# EAGLE board haptic-tactor-strip (EAGLE 5.12)
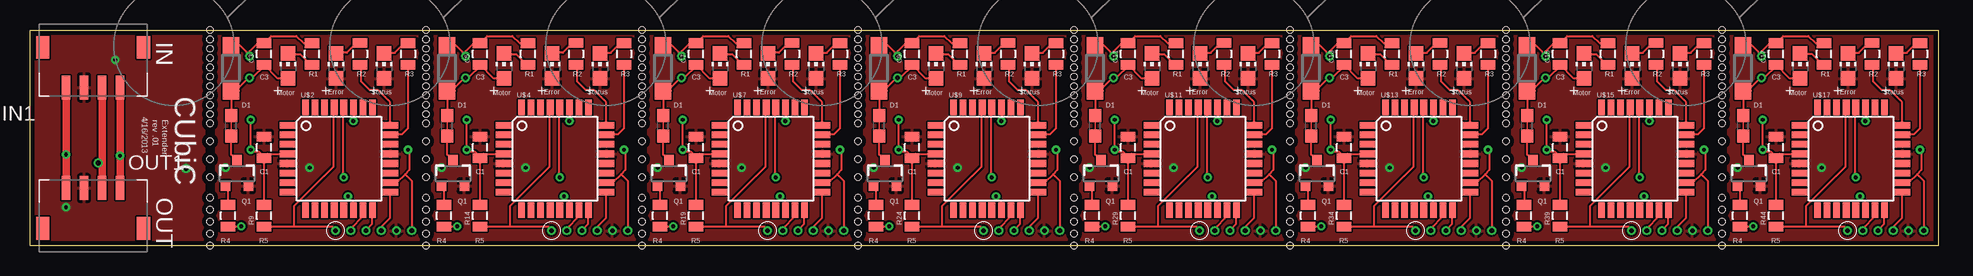
[diagram p0: board, top side]
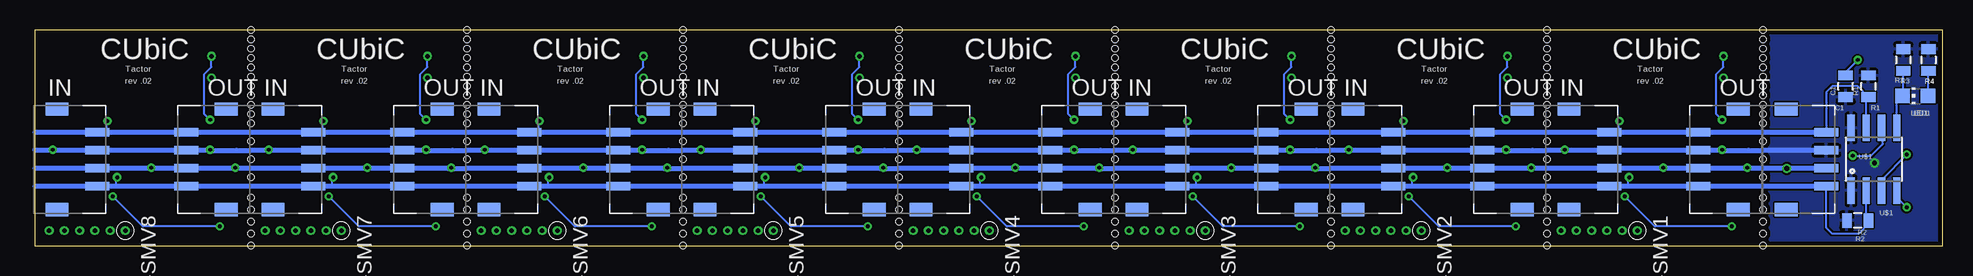
[diagram p1: board, bottom side, seen from below]

Size 159 x 18 mm. Coordinates in mm from the lower left corner, seen from the top.
Outline: 15,0 0,0 0,18 15,18 33,18 51,18 69,18 87,18 105,18 123,18 141,18 159,18 159,0 141,0 123,0 105,0 87,0 69,0 51,0 33,0 15,0
Copper layers (1*16): Top 0.0356mm / dielectric 1.5011mm / Bottom 0.0356mm
Design rules "LaenPCBOrder": minimum track width 6mil, minimum drill 13mil, track to track 6mil, track to pad 6mil, pad to pad 6mil, via to via 6mil, smd to smd 6mil, copper to edge 15mil, drill to drill 6mil, minimum pad ring 7mil, minimum via ring 7mil, stop-mask expansion 4mil, vias tented up to drill 0mil, thermal gap 10mil
Net classes: 1 bus: width 0.406 mm, drill 0.406 mm
Holes 0.51 mm at 15,18 15,17.22 15,16.44 15,15.66 15,14.88 15,14.1 15,13.32 15,12.54 15,11.76 15,10.98 15,10.2 15,0 15,1 15,2 15,3 15,4 15,7.2 15,8.7 15,5.7 33,18 33,17.22 33,16.44 33,15.66 33,14.88 33,14.1 33,13.32 33,12.54 33,11.76 33,10.98 33,10.2 33,0 33,1 33,2 33,3 33,4 33,7.2 33,8.7 33,5.7 51,18 51,17.22 51,16.44 51,15.66 51,14.88 51,14.1 51,13.32 51,12.54 51,11.76 51,10.98 51,10.2 51,0 51,1 51,2 51,3 51,4 51,7.2 51,8.7 51,5.7 141,18 141,17.22 141,16.44 141,15.66 141,14.88 141,14.1 141,13.32 141,12.54 141,11.76 141,10.98 141,10.2 141,0 141,1 141,2 141,3 141,4 141,7.2 141,8.7 141,5.7 123,18 123,17.22 123,16.44 123,15.66 123,14.88 123,14.1 123,13.32 123,12.54 123,11.76 123,10.98 123,10.2 123,0 123,1 123,2 123,3 123,4 123,7.2 123,8.7 123,5.7 105,18 105,17.22 105,16.44 105,15.66 105,14.88 105,14.1 105,13.32 105,12.54 105,11.76 105,10.98 105,10.2 105,0 105,1 105,2 105,3 105,4 105,7.2 105,8.7 105,5.7 87,18 87,17.22 87,16.44 87,15.66 87,14.88 87,14.1 87,13.32 87,12.54 87,11.76 87,10.98 87,10.2 87,0 87,1 87,2 87,3 87,4 87,7.2 87,8.7 87,5.7 69,18 69,17.22 69,16.44 69,15.66 69,14.88 69,14.1 69,13.32 69,12.54 69,11.76 69,10.98 69,10.2 69,0 69,1 69,2 69,3 69,4 69,7.2 69,8.7 69,5.7

## Footprints (pad centres in the part's own frame; a part is rotated, then mirrored left to right if it is on the bottom)
0805 = smd 0.8 x 1.2: 1 -0.9,0; 2 0.9,0
SOD123 = smd 1.4 x 1.4: A 1.9,0; C -1.9,0
S4B-ZR-SM4A-TF = smd 0.7 x 2: P$1 -2.25,-2.3; P$2 -0.75,-2.3; P$3 0.75,-2.3; P$4 2.25,-2.3 | smd 1.1 x 1.9: P$5 -4.2,1.05; P$6 4.2,1.05
CHIP-LED0805 = smd 1.2 x 1.2: A 0,-1.05; C 0,1.05
SOT23-3 = smd 0.8 x 0.9: 1 -0.95,-1; 2 0.95,-1; 3 0,1.1
0603-TRACE = smd 1.1 x 1: 1 -0.85,0; 2 0.85,0
SO08 = smd 0.61 x 2.21: 1 -1.905,-2.616; 2 -0.635,-2.616; 3 0.635,-2.616; 4 1.905,-2.616; 5 1.905,2.616; 6 0.635,2.616; 7 -0.635,2.616; 8 -1.905,2.616
TQFP32-08 = smd 1.27 x 0.559: 1 -4.293,2.8; 2 -4.293,2; 3 -4.293,1.2; 4 -4.293,0.4; 5 -4.293,-0.4; 6 -4.293,-1.2; 7 -4.293,-2; 8 -4.293,-2.8; 17 4.293,-2.8; 18 4.293,-2; 19 4.293,-1.2; 20 4.293,-0.4; 21 4.293,0.4; 22 4.293,1.2; 23 4.293,2; 24 4.293,2.8 | smd 0.559 x 1.27: 9 -2.8,-4.293; 10 -2,-4.293; 11 -1.2,-4.293; 12 -0.4,-4.293; 13 0.4,-4.293; 14 1.2,-4.293; 15 2,-4.293; 16 2.8,-4.293; 25 2.8,4.293; 26 2,4.293; 27 1.2,4.293; 28 0.4,4.293; 29 -0.4,4.293; 30 -1.2,4.293; 31 -2,4.293; 32 -2.8,4.293
VIBE-MOTOR-10MM-SMALLVIA = drill 0.381 round: + -5.08,-3.81; - -6.35,-2.54
POGOPROG-CONN-SMALLERVIAS = drill 0.381 round: 1 0,2.54; 2 0,1.27; 3 0,0; 4 0,-1.27; 5 0,-2.54; 6 0,-3.81

## Placement (x,y rotation side)
C1  0.01uF  [0805]  8.1,13.3 90 bottom
C2  0.1uF  [0805]  19.5,8.2 90 top
C3  Optional  [0805]  19.5,16 90 top
C4  0.1uF  [0805]  37.5,8.2 90 top
C5  Optional  [0805]  37.5,16 90 top
C6  0.1uF  [0805]  55.5,8.2 90 top
C7  Optional  [0805]  55.5,16 90 top
C8  0.1uF  [0805]  73.5,8.2 90 top
C9  Optional  [0805]  73.5,16 90 top
C10  0.1uF  [0805]  91.5,8.2 90 top
C11  Optional  [0805]  91.5,16 90 top
C12  0.1uF  [0805]  109.5,8.2 90 top
C13  Optional  [0805]  109.5,16 90 top
C14  0.1uF  [0805]  127.5,8.2 90 top
C15  Optional  [0805]  127.5,16 90 top
C16  0.1uF  [0805]  145.5,8.2 90 top
C17  Optional  [0805]  145.5,16 90 top
D1  [SOD123]  16.75,14.8 270 top
D2  [SOD123]  34.75,14.8 270 top
D3  [SOD123]  52.75,14.8 270 top
D4  [SOD123]  70.75,14.8 270 top
D5  [SOD123]  88.75,14.8 270 top
D6  [SOD123]  106.75,14.8 270 top
D7  [SOD123]  124.75,14.8 270 top
D8  [SOD123]  142.75,14.8 270 top
IN  S4B-ZR-SM4A-TF  [S4B-ZR-SM4A-TF]  12,7.2 90 bottom
IN1  S4B-ZR-SM4A-TF  [S4B-ZR-SM4A-TF]  5.25,15.5 0 top
IN2  S4B-ZR-SM4A-TF  [S4B-ZR-SM4A-TF]  30.1,7.2 90 bottom
IN3  S4B-ZR-SM4A-TF  [S4B-ZR-SM4A-TF]  48.1,7.2 90 bottom
IN4  S4B-ZR-SM4A-TF  [S4B-ZR-SM4A-TF]  66.1,7.2 90 bottom
IN5  S4B-ZR-SM4A-TF  [S4B-ZR-SM4A-TF]  84.1,7.2 90 bottom
IN6  S4B-ZR-SM4A-TF  [S4B-ZR-SM4A-TF]  102.1,7.2 90 bottom
IN7  S4B-ZR-SM4A-TF  [S4B-ZR-SM4A-TF]  120.1,7.2 90 bottom
IN8  S4B-ZR-SM4A-TF  [S4B-ZR-SM4A-TF]  138.1,7.2 90 bottom
IN9  S4B-ZR-SM4A-TF  [S4B-ZR-SM4A-TF]  156.1,7.2 90 bottom
LED1  [CHIP-LED0805]  2.3,12.5 90 bottom
LED2  [CHIP-LED0805]  21.5,15 0 top
LED3  [CHIP-LED0805]  25.5,15 0 top
LED4  [CHIP-LED0805]  29.5,15 0 top
LED5  [CHIP-LED0805]  39.5,15 0 top
LED6  [CHIP-LED0805]  43.5,15 0 top
LED7  [CHIP-LED0805]  47.5,15 0 top
LED8  [CHIP-LED0805]  57.5,15 0 top
LED9  [CHIP-LED0805]  61.5,15 0 top
LED10  [CHIP-LED0805]  65.5,15 0 top
LED11  [CHIP-LED0805]  75.5,15 0 top
LED12  [CHIP-LED0805]  79.5,15 0 top
LED13  [CHIP-LED0805]  83.5,15 0 top
LED14  [CHIP-LED0805]  93.5,15 0 top
LED15  [CHIP-LED0805]  97.5,15 0 top
LED16  [CHIP-LED0805]  101.5,15 0 top
LED17  [CHIP-LED0805]  111.5,15 0 top
LED18  [CHIP-LED0805]  115.5,15 0 top
LED19  [CHIP-LED0805]  119.5,15 0 top
LED20  [CHIP-LED0805]  129.5,15 0 top
LED21  [CHIP-LED0805]  133.5,15 0 top
LED22  [CHIP-LED0805]  137.5,15 0 top
LED23  [CHIP-LED0805]  147.5,15 0 top
LED24  [CHIP-LED0805]  151.5,15 0 top
LED25  [CHIP-LED0805]  155.5,15 0 top
OUT  S4B-ZR-SM4A-TF  [S4B-ZR-SM4A-TF]  18.1,7.2 270 bottom
OUT1  S4B-ZR-SM4A-TF  [S4B-ZR-SM4A-TF]  5.25,2.5 180 top
OUT2  S4B-ZR-SM4A-TF  [S4B-ZR-SM4A-TF]  36.1,7.2 270 bottom
OUT3  S4B-ZR-SM4A-TF  [S4B-ZR-SM4A-TF]  54.1,7.2 270 bottom
OUT4  S4B-ZR-SM4A-TF  [S4B-ZR-SM4A-TF]  72.1,7.2 270 bottom
OUT5  S4B-ZR-SM4A-TF  [S4B-ZR-SM4A-TF]  90.1,7.2 270 bottom
OUT6  S4B-ZR-SM4A-TF  [S4B-ZR-SM4A-TF]  108.1,7.2 270 bottom
OUT7  S4B-ZR-SM4A-TF  [S4B-ZR-SM4A-TF]  126.1,7.2 270 bottom
OUT8  S4B-ZR-SM4A-TF  [S4B-ZR-SM4A-TF]  144.1,7.2 270 bottom
Q1  MOSFET-NCHANNELSMD  [SOT23-3]  17.25,6 0 top
Q2  MOSFET-NCHANNELSMD  [SOT23-3]  35.25,6 0 top
Q3  MOSFET-NCHANNELSMD  [SOT23-3]  53.25,6 0 top
Q4  MOSFET-NCHANNELSMD  [SOT23-3]  71.25,6 0 top
Q5  MOSFET-NCHANNELSMD  [SOT23-3]  89.25,6 0 top
Q6  MOSFET-NCHANNELSMD  [SOT23-3]  107.25,6 0 top
Q7  MOSFET-NCHANNELSMD  [SOT23-3]  125.25,6 0 top
Q8  MOSFET-NCHANNELSMD  [SOT23-3]  143.25,6 0 top
R1  10k  [0805]  6.2,13.3 90 bottom
R2  10k  [0805]  7.1,2.1 180 bottom
R3  10k  [0805]  3.3,15.5 270 bottom
R4  470  [0805]  1.2,15.5 270 bottom
R5  470  [0805]  27.5,16 270.1 top
R6  470  [0805]  31.5,16 270 top
R7  470  [0805]  23.5,16 90 top
R8  10k  [0805]  16.5,2.5 90 top
R9  10k  [0805]  19.5,2.5 90 top
R10  470  [0805]  45.5,16 270.1 top
R11  470  [0805]  49.5,16 270 top
R12  470  [0805]  41.5,16 90 top
R13  10k  [0805]  34.5,2.5 90 top
R14  10k  [0805]  37.5,2.5 90 top
R15  470  [0805]  63.5,16 270.1 top
R16  470  [0805]  67.5,16 270 top
R17  470  [0805]  59.5,16 90 top
R18  10k  [0805]  52.5,2.5 90 top
R19  10k  [0805]  55.5,2.5 90 top
R20  470  [0805]  81.5,16 270.1 top
R21  470  [0805]  85.5,16 270 top
R22  470  [0805]  77.5,16 90 top
R23  10k  [0805]  70.5,2.5 90 top
R24  10k  [0805]  73.5,2.5 90 top
R25  470  [0805]  99.5,16 270.1 top
R26  470  [0805]  103.5,16 270 top
R27  470  [0805]  95.5,16 90 top
R28  10k  [0805]  88.5,2.5 90 top
R29  10k  [0805]  91.5,2.5 90 top
R30  470  [0805]  117.5,16 270.1 top
R31  470  [0805]  121.5,16 270 top
R32  470  [0805]  113.5,16 90 top
R33  10k  [0805]  106.5,2.5 90 top
R34  10k  [0805]  109.5,2.5 90 top
R35  470  [0805]  135.5,16 270.1 top
R36  470  [0805]  139.5,16 270 top
R37  470  [0805]  131.5,16 90 top
R38  10k  [0805]  124.5,2.5 90 top
R39  10k  [0805]  127.5,2.5 90 top
R40  470  [0805]  153.5,16 270.1 top
R41  470  [0805]  157.5,16 270 top
R42  470  [0805]  149.5,16 90 top
R43  10k  [0805]  142.5,2.5 90 top
R44  10k  [0805]  145.5,2.5 90 top
SJ1  SOLDERJUMPER0603  [0603-TRACE]  16.75,10 90 top
SJ2  SOLDERJUMPER0603  [0603-TRACE]  34.75,10 90 top
SJ3  SOLDERJUMPER0603  [0603-TRACE]  52.75,10 90 top
SJ4  SOLDERJUMPER0603  [0603-TRACE]  70.75,10 90 top
SJ5  SOLDERJUMPER0603  [0603-TRACE]  88.75,10 90 top
SJ6  SOLDERJUMPER0603  [0603-TRACE]  106.75,10 90 top
SJ7  SOLDERJUMPER0603  [0603-TRACE]  124.75,10 90 top
SJ8  SOLDERJUMPER0603  [0603-TRACE]  142.75,10 90 top
U$1  BUS-EXTENDER  [SO08]  5.75,7.2 0 bottom
U$2  ATTINY48  [TQFP32-08]  25.75,7.25 0 top
U$3  MOTORSMALLVIA  [VIBE-MOTOR-10MM-SMALLVIA]  30,16.7 135 top
U$4  ATTINY48  [TQFP32-08]  43.75,7.25 0 top
U$5  MOTORSMALLVIA  [VIBE-MOTOR-10MM-SMALLVIA]  48,16.7 135 top
U$6  MOTORSMALLVIA  [VIBE-MOTOR-10MM-SMALLVIA]  12,16.7 135 top
U$7  ATTINY48  [TQFP32-08]  61.75,7.25 0 top
U$8  MOTORSMALLVIA  [VIBE-MOTOR-10MM-SMALLVIA]  66,16.7 135 top
U$9  ATTINY48  [TQFP32-08]  79.75,7.25 0 top
U$10  MOTORSMALLVIA  [VIBE-MOTOR-10MM-SMALLVIA]  84,16.7 135 top
U$11  ATTINY48  [TQFP32-08]  97.75,7.25 0 top
U$12  MOTORSMALLVIA  [VIBE-MOTOR-10MM-SMALLVIA]  102,16.7 135 top
U$13  ATTINY48  [TQFP32-08]  115.75,7.25 0 top
U$14  MOTORSMALLVIA  [VIBE-MOTOR-10MM-SMALLVIA]  120,16.7 135 top
U$15  ATTINY48  [TQFP32-08]  133.75,7.25 0 top
U$16  MOTORSMALLVIA  [VIBE-MOTOR-10MM-SMALLVIA]  138,16.7 135 top
U$17  ATTINY48  [TQFP32-08]  151.75,7.25 0 top
WITHVIAS-SMV1  POGOPROG-CONNWITH-VIAS  [POGOPROG-CONN-SMALLERVIAS]  28,1.25 270 bottom
WITHVIAS-SMV2  POGOPROG-CONNWITH-VIAS  [POGOPROG-CONN-SMALLERVIAS]  46,1.25 270 bottom
WITHVIAS-SMV3  POGOPROG-CONNWITH-VIAS  [POGOPROG-CONN-SMALLERVIAS]  64,1.25 270 bottom
WITHVIAS-SMV4  POGOPROG-CONNWITH-VIAS  [POGOPROG-CONN-SMALLERVIAS]  82,1.25 270 bottom
WITHVIAS-SMV5  POGOPROG-CONNWITH-VIAS  [POGOPROG-CONN-SMALLERVIAS]  100,1.25 270 bottom
WITHVIAS-SMV6  POGOPROG-CONNWITH-VIAS  [POGOPROG-CONN-SMALLERVIAS]  118,1.25 270 bottom
WITHVIAS-SMV7  POGOPROG-CONNWITH-VIAS  [POGOPROG-CONN-SMALLERVIAS]  136,1.25 270 bottom
WITHVIAS-SMV8  POGOPROG-CONNWITH-VIAS  [POGOPROG-CONN-SMALLERVIAS]  154,1.25 270 bottom

## Library data of the parts
C1-C17 Q1-Q8 R1-R44 = SparkFun
D1-D8 = diode
IN IN1-IN9 OUT OUT1-OUT8 = cubic
LED1 = led
LED2-LED25 = adafruit
SJ1-SJ8 U$1-U$17 = jjr
WITHVIAS-SMV1-WITHVIAS-SMV8 = pogoProg-eagle5

## Nets
ERROR: R5.2 U$2.24
ERROR1: R10.2 U$4.24
ERROR2: R15.2 U$7.24
ERROR3: R20.2 U$9.24
ERROR4: R25.2 U$11.24
ERROR5: R30.2 U$13.24
ERROR6: R35.2 U$15.24
ERROR7: R40.2 U$17.24
GND [bus]: C1.2 IN1.P$2 IN.P$2 OUT1.P$3 U$1.4
GND1: C2.2 IN2.P$2 LED3.A LED4.A OUT.P$3 Q1.2 U$2.5 U$2.21 WITHVIAS-SMV1.5
GND2: C4.2 IN3.P$2 LED6.A LED7.A OUT2.P$3 Q2.2 U$4.5 U$4.21 WITHVIAS-SMV2.5
GND3: C6.2 IN4.P$2 LED9.A LED10.A OUT3.P$3 Q3.2 U$7.5 U$7.21 WITHVIAS-SMV3.5
GND4: C8.2 IN5.P$2 LED12.A LED13.A OUT4.P$3 Q4.2 U$9.5 U$9.21 WITHVIAS-SMV4.5
GND5: C10.2 IN6.P$2 LED15.A LED16.A OUT5.P$3 Q5.2 U$11.5 U$11.21 WITHVIAS-SMV5.5
GND6: C12.2 IN7.P$2 LED18.A LED19.A OUT6.P$3 Q6.2 U$13.5 U$13.21 WITHVIAS-SMV6.5
GND7: C14.2 IN8.P$2 LED21.A LED22.A OUT7.P$3 Q7.2 U$15.5 U$15.21 WITHVIAS-SMV7.5
GND8: C16.2 IN9.P$2 LED24.A LED25.A OUT8.P$3 Q8.2 U$17.5 U$17.21 WITHVIAS-SMV8.5
MISO: U$2.16 WITHVIAS-SMV1.3
MISO1: U$4.16 WITHVIAS-SMV2.3
MISO2: U$7.16 WITHVIAS-SMV3.3
MISO3: U$9.16 WITHVIAS-SMV4.3
MISO4: U$11.16 WITHVIAS-SMV5.3
MISO5: U$13.16 WITHVIAS-SMV6.3
MISO6: U$15.16 WITHVIAS-SMV7.3
MISO7: U$17.16 WITHVIAS-SMV8.3
MOSI: U$2.15 WITHVIAS-SMV1.2
MOSI1: U$4.15 WITHVIAS-SMV2.2
MOSI2: U$7.15 WITHVIAS-SMV3.2
MOSI3: U$9.15 WITHVIAS-SMV4.2
MOSI4: U$11.15 WITHVIAS-SMV5.2
MOSI5: U$13.15 WITHVIAS-SMV6.2
MOSI6: U$15.15 WITHVIAS-SMV7.2
MOSI7: U$17.15 WITHVIAS-SMV8.2
N$1: LED1.C R3.2 U$1.5
N$2: LED1.A R4.2
N$3: C3.1 D1.A LED2.A SJ1.2 U$6.-
N$4: LED3.C R5.1
N$5: LED4.C R6.1
N$6: LED2.C R7.1
N$7: Q1.3 SJ1.1
N$8: LED5.C R12.1
N$9: Q1.1 R8.2
N$10: LED6.C R10.1
N$11: LED7.C R11.1
N$12: Q2.1 R13.2
N$13: C5.1 D2.A LED5.A SJ2.2 U$3.-
N$14: Q2.3 SJ2.1
N$15: LED8.C R17.1
N$16: LED9.C R15.1
N$17: LED10.C R16.1
N$18: Q3.1 R18.2
N$19: C7.1 D3.A LED8.A SJ3.2 U$5.-
N$20: Q3.3 SJ3.1
N$21: LED11.C R22.1
N$22: LED12.C R20.1
N$23: LED13.C R21.1
N$24: Q4.1 R23.2
N$25: C9.1 D4.A LED11.A SJ4.2 U$8.-
N$26: Q4.3 SJ4.1
N$27: LED14.C R27.1
N$28: LED15.C R25.1
N$29: LED16.C R26.1
N$30: Q5.1 R28.2
N$31: C11.1 D5.A LED14.A SJ5.2 U$10.-
N$32: Q5.3 SJ5.1
N$33: LED17.C R32.1
N$34: LED18.C R30.1
N$35: LED19.C R31.1
N$36: Q6.1 R33.2
N$37: C13.1 D6.A LED17.A SJ6.2 U$12.-
N$38: Q6.3 SJ6.1
N$39: LED20.C R37.1
N$40: LED21.C R35.1
N$41: LED22.C R36.1
N$42: Q7.1 R38.2
N$43: C15.1 D7.A LED20.A SJ7.2 U$14.-
N$44: Q7.3 SJ7.1
N$45: LED23.C R42.1
N$46: LED24.C R40.1
N$47: LED25.C R41.1
N$48: Q8.1 R43.2
N$49: C17.1 D8.A LED23.A SJ8.2 U$16.-
N$50: Q8.3 SJ8.1
RESET: R9.1 U$2.29 WITHVIAS-SMV1.1
RESET1: R14.1 U$4.29 WITHVIAS-SMV2.1
RESET2: R19.1 U$7.29 WITHVIAS-SMV3.1
RESET3: R24.1 U$9.29 WITHVIAS-SMV4.1
RESET4: R29.1 U$11.29 WITHVIAS-SMV5.1
RESET5: R34.1 U$13.29 WITHVIAS-SMV6.1
RESET6: R39.1 U$15.29 WITHVIAS-SMV7.1
RESET7: R44.1 U$17.29 WITHVIAS-SMV8.1
SCK: U$2.17 WITHVIAS-SMV1.4
SCK1: U$4.17 WITHVIAS-SMV2.4
SCK2: U$7.17 WITHVIAS-SMV3.4
SCK3: U$9.17 WITHVIAS-SMV4.4
SCK4: U$11.17 WITHVIAS-SMV5.4
SCK5: U$13.17 WITHVIAS-SMV6.4
SCK6: U$15.17 WITHVIAS-SMV7.4
SCK7: U$17.17 WITHVIAS-SMV8.4
SCL [bus]: IN1.P$1 OUT1.P$4 U$1.3
SCL1: IN2.P$1 OUT.P$4 U$2.28
SCL2: IN.P$1 R2.1 U$1.2
SCL3: IN3.P$1 OUT2.P$4 U$4.28
SCL4: IN4.P$1 OUT3.P$4 U$7.28
SCL5: IN5.P$1 OUT4.P$4 U$9.28
SCL6: IN6.P$1 OUT5.P$4 U$11.28
SCL7: IN7.P$1 OUT6.P$4 U$13.28
SCL8: IN8.P$1 OUT7.P$4 U$15.28
SCL9: IN9.P$1 OUT8.P$4 U$17.28
SDA [bus]: IN1.P$4 OUT1.P$1 U$1.6
SDA1: IN2.P$4 OUT.P$1 U$2.27
SDA2: IN.P$4 R1.1 U$1.7
SDA3: IN3.P$4 OUT2.P$1 U$4.27
SDA4: IN4.P$4 OUT3.P$1 U$7.27
SDA5: IN5.P$4 OUT4.P$1 U$9.27
SDA6: IN6.P$4 OUT5.P$1 U$11.27
SDA7: IN7.P$4 OUT6.P$1 U$13.27
SDA8: IN8.P$4 OUT7.P$1 U$15.27
SDA9: IN9.P$4 OUT8.P$1 U$17.27
SS: R8.1 U$2.14
SS1: R13.1 U$4.14
SS2: R18.1 U$7.14
SS3: R23.1 U$9.14
SS4: R28.1 U$11.14
SS5: R33.1 U$13.14
SS6: R38.1 U$15.14
SS7: R43.1 U$17.14
STATUS: R6.2 U$2.23
STATUS1: R11.2 U$4.23
STATUS2: R16.2 U$7.23
STATUS3: R21.2 U$9.23
STATUS4: R26.2 U$11.23
STATUS5: R31.2 U$13.23
STATUS6: R36.2 U$15.23
STATUS7: R41.2 U$17.23
VCC [bus]: C1.1 IN1.P$3 IN.P$3 OUT1.P$2 R1.2 R2.2 R3.1 R4.1 U$1.1 U$1.8
VCC1: C2.1 C3.2 D1.C IN2.P$3 OUT.P$2 R7.2 R9.2 U$2.4 U$2.18 U$6.+ WITHVIAS-SMV1.6
VCC2: C4.1 C5.2 D2.C IN3.P$3 OUT2.P$2 R12.2 R14.2 U$3.+ U$4.4 U$4.18 WITHVIAS-SMV2.6
VCC3: C6.1 C7.2 D3.C IN4.P$3 OUT3.P$2 R17.2 R19.2 U$5.+ U$7.4 U$7.18 WITHVIAS-SMV3.6
VCC4: C8.1 C9.2 D4.C IN5.P$3 OUT4.P$2 R22.2 R24.2 U$8.+ U$9.4 U$9.18 WITHVIAS-SMV4.6
VCC5: C10.1 C11.2 D5.C IN6.P$3 OUT5.P$2 R27.2 R29.2 U$10.+ U$11.4 U$11.18 WITHVIAS-SMV5.6
VCC6: C12.1 C13.2 D6.C IN7.P$3 OUT6.P$2 R32.2 R34.2 U$12.+ U$13.4 U$13.18 WITHVIAS-SMV6.6
VCC7: C14.1 C15.2 D7.C IN8.P$3 OUT7.P$2 R37.2 R39.2 U$14.+ U$15.4 U$15.18 WITHVIAS-SMV7.6
VCC8: C16.1 C17.2 D8.C IN9.P$3 OUT8.P$2 R42.2 R44.2 U$16.+ U$17.4 U$17.18 WITHVIAS-SMV8.6

## Tracks (layer width: path | path; a pad name or v marks a point on that pad's centre or on a via)
ERROR
  Top 0.152: R5.2 27.6,15.1 27.6,13.7 28.3,13 29,13 30,12 30,10.1 U$2.24
ERROR1
  Top 0.152: R10.2 45.6,15.1 45.6,13.7 46.3,13 47,13 48,12 48,10.1 U$4.24
ERROR2
  Top 0.152: R15.2 63.6,15.1 63.6,13.7 64.3,13 65,13 66,12 66,10.1 U$7.24
ERROR3
  Top 0.152: R20.2 81.6,15.1 81.6,13.7 82.3,13 83,13 84,12 84,10.1 U$9.24
ERROR4
  Top 0.152: R25.2 99.6,15.1 99.6,13.7 100.3,13 101,13 102,12 102,10.1 U$11.24
ERROR5
  Top 0.152: R30.2 117.6,15.1 117.6,13.7 118.3,13 119,13 120,12 120,10.1 U$13.24
ERROR6
  Top 0.152: R35.2 135.6,15.1 135.6,13.7 136.3,13 137,13 138,12 138,10.1 U$15.24
ERROR7
  Top 0.152: R40.2 153.6,15.1 153.6,13.7 154.3,13 155,13 156,12 156,10.1 U$17.24
GND  (via drill 0.33, 0.41)
  Top 0.406: OUT1.P$3 4.4,4.5
  Bottom 0.152: C1.2 8.1,14.5 v7.1,15.5 | 3.8,4.5 3.8,4 v3,3.2
  Bottom 0.406: U$1.4 3.8,4.5 | 15,6.45 v13,6.45 IN.P$2 10,6.5
  pour Top: 0,18 14.5,18 14.5,0 0,0
GND1  (via drill 0.33)
  Bottom 0.152: 16.6,6.4 16.6,6.45 v16.3,6.5
  Bottom 0.406: 33,6.45 IN2.P$2 OUT.P$3 16.6,6.45 15,6.45
  other vias: 23.3,6.5
  pour Top: 32.5,18 32.5,0 15.5,0 15.5,18
GND2  (via drill 0.33)
  Bottom 0.152: 34.6,6.4 34.6,6.45 v34.3,6.5
  Bottom 0.406: 51,6.45 IN3.P$2 OUT2.P$3 34.6,6.45 33,6.45
  other vias: 41.3,6.5
  pour Top: 50.5,18 50.5,0 33.5,0 33.5,18
GND3  (via drill 0.33)
  Bottom 0.152: 52.6,6.4 52.6,6.45 v52.3,6.5
  Bottom 0.406: 69,6.45 IN4.P$2 OUT3.P$3 52.6,6.45 51,6.45
  other vias: 59.3,6.5
  pour Top: 68.5,18 68.5,0 51.5,0 51.5,18
GND4  (via drill 0.33)
  Bottom 0.152: 70.6,6.4 70.6,6.45 v70.3,6.5
  Bottom 0.406: 87,6.45 IN5.P$2 OUT4.P$3 70.6,6.45 69,6.45
  other vias: 77.3,6.5
  pour Top: 86.5,18 86.5,0 69.5,0 69.5,18
GND5  (via drill 0.33)
  Bottom 0.152: 88.6,6.4 88.6,6.45 v88.3,6.5
  Bottom 0.406: 105,6.45 IN6.P$2 OUT5.P$3 88.6,6.45 87,6.45
  other vias: 95.3,6.5
  pour Top: 104.5,18 104.5,0 87.5,0 87.5,18
GND6  (via drill 0.33)
  Bottom 0.152: 106.6,6.4 106.6,6.45 v106.3,6.5
  Bottom 0.406: 123,6.45 IN7.P$2 OUT6.P$3 106.6,6.45 105,6.45
  other vias: 113.3,6.5
  pour Top: 122.5,18 122.5,0 105.5,0 105.5,18
GND7  (via drill 0.33)
  Bottom 0.152: 124.6,6.4 124.6,6.45 v124.3,6.5
  Bottom 0.406: 141,6.45 IN8.P$2 OUT7.P$3 124.6,6.45 123,6.45
  other vias: 131.3,6.5
  pour Top: 140.5,18 140.5,0 123.5,0 123.5,18
GND8  (via drill 0.33)
  Bottom 0.152: 142.6,6.4 142.6,6.45 v142.3,6.5
  Bottom 0.406: 159,6.45 IN9.P$2 OUT8.P$3 142.6,6.45 141,6.45
  other vias: 149.3,6.5
  pour Top: 158.5,18 158.5,0 141.5,0 141.5,18
MISO
  Top 0.152: U$2.16 28.5,2.9 28.5,1.8 28,1.3 WITHVIAS-SMV1.3
MISO1
  Top 0.152: U$4.16 46.5,2.9 46.5,1.8 46,1.3 WITHVIAS-SMV2.3
MISO2
  Top 0.152: U$7.16 64.5,2.9 64.5,1.8 64,1.3 WITHVIAS-SMV3.3
MISO3
  Top 0.152: U$9.16 82.5,2.9 82.5,1.8 82,1.3 WITHVIAS-SMV4.3
MISO4
  Top 0.152: U$11.16 100.5,2.9 100.5,1.8 100,1.3 WITHVIAS-SMV5.3
MISO5
  Top 0.152: U$13.16 118.5,2.9 118.5,1.8 118,1.3 WITHVIAS-SMV6.3
MISO6
  Top 0.152: U$15.16 136.5,2.9 136.5,1.8 136,1.3 WITHVIAS-SMV7.3
MISO7
  Top 0.152: U$17.16 154.5,2.9 154.5,1.8 154,1.3 WITHVIAS-SMV8.3
MOSI
  Top 0.152: U$2.15 27.7,2.9 27.7,2.4 26.8,1.5 26.8,1.3 WITHVIAS-SMV1.2
MOSI1
  Top 0.152: U$4.15 45.7,2.9 45.7,2.4 44.8,1.5 44.8,1.3 WITHVIAS-SMV2.2
MOSI2
  Top 0.152: U$7.15 63.7,2.9 63.7,2.4 62.8,1.5 62.8,1.3 WITHVIAS-SMV3.2
MOSI3
  Top 0.152: U$9.15 81.7,2.9 81.7,2.4 80.8,1.5 80.8,1.3 WITHVIAS-SMV4.2
MOSI4
  Top 0.152: U$11.15 99.7,2.9 99.7,2.4 98.8,1.5 98.8,1.3 WITHVIAS-SMV5.2
MOSI5
  Top 0.152: U$13.15 117.7,2.9 117.7,2.4 116.8,1.5 116.8,1.3 WITHVIAS-SMV6.2
MOSI6
  Top 0.152: U$15.15 135.7,2.9 135.7,2.4 134.8,1.5 134.8,1.3 WITHVIAS-SMV7.2
MOSI7
  Top 0.152: U$17.15 153.7,2.9 153.7,2.4 152.8,1.5 152.8,1.3 WITHVIAS-SMV8.2
N$1
  Bottom 0.152: U$1.5 3.85,12 | 3.85,12 3.85,12.01 | R3.2 3.3,12.5 LED1.C 3.4,12.5 3.9,12 3.85,12
N$2
  Bottom 0.152: R4.2 1.2,12.55 LED1.A
N$3
  Top 0.152: LED2.A 21.5,14 20.6,14 C3.1 19.5,15 18.6,14.1 18.3,14.1 U$6.- 18.2,14 17.1,12.9 | 16.8,12.9 17.1,12.9 | 17.1,12.9 17.4,12.9 | 16.8,12.9 16.8,10.9 SJ1.2 | 16.8,12.9 D1.A
N$4
  Top 0.152: LED3.C 25.5,16.1 26.4,16.1 27.1,16.8 27.4,16.8 R5.1
N$5
  Top 0.152: R6.1 31.2,16.9 30.4,16.1 29.5,16.1 LED4.C
N$6
  Top 0.152: R7.1 23.4,15.1 22.5,16 21.5,16 LED2.C
N$7
  Top 0.152: Q1.3 16.75,7.6 SJ1.1
N$8
  Top 0.152: R12.1 41.4,15.1 40.5,16 39.5,16 LED5.C
N$9
  Top 0.152: R8.2 16.5,5 Q1.1
N$10
  Top 0.152: LED6.C 43.5,16.1 44.4,16.1 45.1,16.8 45.4,16.8 R10.1
N$11
  Top 0.152: R11.1 49.2,16.9 48.4,16.1 47.5,16.1 LED7.C
N$12
  Top 0.152: R13.2 34.5,5 Q2.1
N$13
  Top 0.152: LED5.A 39.5,14 38.6,14 C5.1 37.5,15 36.6,14.1 36.3,14.1 U$3.- 36.2,14 35.1,12.9 | 34.8,12.9 35.1,12.9 | 35.1,12.9 35.4,12.9 | 34.8,12.9 34.8,10.9 SJ2.2 | 34.8,12.9 D2.A
N$14
  Top 0.152: Q2.3 34.75,7.6 SJ2.1
N$15
  Top 0.152: R17.1 59.4,15.1 58.5,16 57.5,16 LED8.C
N$16
  Top 0.152: LED9.C 61.5,16.1 62.4,16.1 63.1,16.8 63.4,16.8 R15.1
N$17
  Top 0.152: R16.1 67.2,16.9 66.4,16.1 65.5,16.1 LED10.C
N$18
  Top 0.152: R18.2 52.5,5 Q3.1
N$19
  Top 0.152: LED8.A 57.5,14 56.6,14 C7.1 55.5,15 54.6,14.1 54.3,14.1 U$5.- 54.2,14 53.1,12.9 | 52.8,12.9 53.1,12.9 | 53.1,12.9 53.4,12.9 | 52.8,12.9 52.8,10.9 SJ3.2 | 52.8,12.9 D3.A
N$20
  Top 0.152: Q3.3 52.75,7.6 SJ3.1
N$21
  Top 0.152: R22.1 77.4,15.1 76.5,16 75.5,16 LED11.C
N$22
  Top 0.152: LED12.C 79.5,16.1 80.4,16.1 81.1,16.8 81.4,16.8 R20.1
N$23
  Top 0.152: R21.1 85.2,16.9 84.4,16.1 83.5,16.1 LED13.C
N$24
  Top 0.152: R23.2 70.5,5 Q4.1
N$25
  Top 0.152: LED11.A 75.5,14 74.6,14 C9.1 73.5,15 72.6,14.1 72.3,14.1 U$8.- 72.2,14 71.1,12.9 | 70.8,12.9 71.1,12.9 | 71.1,12.9 71.4,12.9 | 70.8,12.9 70.8,10.9 SJ4.2 | 70.8,12.9 D4.A
N$26
  Top 0.152: Q4.3 70.75,7.6 SJ4.1
N$27
  Top 0.152: R27.1 95.4,15.1 94.5,16 93.5,16 LED14.C
N$28
  Top 0.152: LED15.C 97.5,16.1 98.4,16.1 99.1,16.8 99.4,16.8 R25.1
N$29
  Top 0.152: R26.1 103.2,16.9 102.4,16.1 101.5,16.1 LED16.C
N$30
  Top 0.152: R28.2 88.5,5 Q5.1
N$31
  Top 0.152: LED14.A 93.5,14 92.6,14 C11.1 91.5,15 90.6,14.1 90.3,14.1 U$10.- 90.2,14 89.1,12.9 | 88.8,12.9 89.1,12.9 | 89.1,12.9 89.4,12.9 | 88.8,12.9 88.8,10.9 SJ5.2 | 88.8,12.9 D5.A
N$32
  Top 0.152: Q5.3 88.75,7.6 SJ5.1
N$33
  Top 0.152: R32.1 113.4,15.1 112.5,16 111.5,16 LED17.C
N$34
  Top 0.152: LED18.C 115.5,16.1 116.4,16.1 117.1,16.8 117.4,16.8 R30.1
N$35
  Top 0.152: R31.1 121.2,16.9 120.4,16.1 119.5,16.1 LED19.C
N$36
  Top 0.152: R33.2 106.5,5 Q6.1
N$37
  Top 0.152: LED17.A 111.5,14 110.6,14 C13.1 109.5,15 108.6,14.1 108.3,14.1 U$12.- 108.2,14 107.1,12.9 | 106.8,12.9 107.1,12.9 | 107.1,12.9 107.4,12.9 | 106.8,12.9 106.8,10.9 SJ6.2 | 106.8,12.9 D6.A
N$38
  Top 0.152: Q6.3 106.75,7.6 SJ6.1
N$39
  Top 0.152: R37.1 131.4,15.1 130.5,16 129.5,16 LED20.C
N$40
  Top 0.152: LED21.C 133.5,16.1 134.4,16.1 135.1,16.8 135.4,16.8 R35.1
N$41
  Top 0.152: R36.1 139.2,16.9 138.4,16.1 137.5,16.1 LED22.C
N$42
  Top 0.152: R38.2 124.5,5 Q7.1
N$43
  Top 0.152: LED20.A 129.5,14 128.6,14 C15.1 127.5,15 126.6,14.1 126.3,14.1 U$14.- 126.2,14 125.1,12.9 | 124.8,12.9 125.1,12.9 | 125.1,12.9 125.4,12.9 | 124.8,12.9 124.8,10.9 SJ7.2 | 124.8,12.9 D7.A
N$44
  Top 0.152: Q7.3 124.75,7.6 SJ7.1
N$45
  Top 0.152: R42.1 149.4,15.1 148.5,16 147.5,16 LED23.C
N$46
  Top 0.152: LED24.C 151.5,16.1 152.4,16.1 153.1,16.8 153.4,16.8 R40.1
N$47
  Top 0.152: R41.1 157.2,16.9 156.4,16.1 155.5,16.1 LED25.C
N$48
  Top 0.152: R43.2 142.5,5 Q8.1
N$49
  Top 0.152: LED23.A 147.5,14 146.6,14 C17.1 145.5,15 144.6,14.1 144.3,14.1 U$16.- 144.2,14 143.1,12.9 | 142.8,12.9 143.1,12.9 | 143.1,12.9 143.4,12.9 | 142.8,12.9 142.8,10.9 SJ8.2 | 142.8,12.9 D8.A
N$50
  Top 0.152: Q8.3 142.75,7.6 SJ8.1
RESET
  Top 0.152: 22,1.6 25.2,1.6 25.5,1.3 WITHVIAS-SMV1.1 | 22,1.6 22,3.3 25.3,6.6 25.3,11.5 U$2.29 | R9.1 22,1.6
RESET1
  Top 0.152: 40,1.6 43.2,1.6 43.5,1.3 WITHVIAS-SMV2.1 | 40,1.6 40,3.3 43.3,6.6 43.3,11.5 U$4.29 | R14.1 40,1.6
RESET2
  Top 0.152: 58,1.6 61.2,1.6 61.5,1.3 WITHVIAS-SMV3.1 | 58,1.6 58,3.3 61.3,6.6 61.3,11.5 U$7.29 | R19.1 58,1.6
RESET3
  Top 0.152: 76,1.6 79.2,1.6 79.5,1.3 WITHVIAS-SMV4.1 | 76,1.6 76,3.3 79.3,6.6 79.3,11.5 U$9.29 | R24.1 76,1.6
RESET4
  Top 0.152: 94,1.6 97.2,1.6 97.5,1.3 WITHVIAS-SMV5.1 | 94,1.6 94,3.3 97.3,6.6 97.3,11.5 U$11.29 | R29.1 94,1.6
RESET5
  Top 0.152: 112,1.6 115.2,1.6 115.5,1.3 WITHVIAS-SMV6.1 | 112,1.6 112,3.3 115.3,6.6 115.3,11.5 U$13.29 | R34.1 112,1.6
RESET6
  Top 0.152: 130,1.6 133.2,1.6 133.5,1.3 WITHVIAS-SMV7.1 | 130,1.6 130,3.3 133.3,6.6 133.3,11.5 U$15.29 | R39.1 130,1.6
RESET7
  Top 0.152: 148,1.6 151.2,1.6 151.5,1.3 WITHVIAS-SMV8.1 | 148,1.6 148,3.3 151.3,6.6 151.3,11.5 U$17.29 | R44.1 148,1.6
SCK
  Top 0.152: U$2.17 30,4.4 30,2.3 29.3,1.6 29.3,1.3 WITHVIAS-SMV1.4
SCK1
  Top 0.152: U$4.17 48,4.4 48,2.3 47.3,1.6 47.3,1.3 WITHVIAS-SMV2.4
SCK2
  Top 0.152: U$7.17 66,4.4 66,2.3 65.3,1.6 65.3,1.3 WITHVIAS-SMV3.4
SCK3
  Top 0.152: U$9.17 84,4.4 84,2.3 83.3,1.6 83.3,1.3 WITHVIAS-SMV4.4
SCK4
  Top 0.152: U$11.17 102,4.4 102,2.3 101.3,1.6 101.3,1.3 WITHVIAS-SMV5.4
SCK5
  Top 0.152: U$13.17 120,4.4 120,2.3 119.3,1.6 119.3,1.3 WITHVIAS-SMV6.4
SCK6
  Top 0.152: U$15.17 138,4.4 138,2.3 137.3,1.6 137.3,1.3 WITHVIAS-SMV7.4
SCK7
  Top 0.152: U$17.17 156,4.4 156,2.3 155.3,1.6 155.3,1.3 WITHVIAS-SMV8.4
SCL  (via drill 0.33)
  Top 0.61: IN1.P$1 v3,7.6 OUT1.P$4
  Bottom 0.152: 5.1,5.3 5.1,5.5 v3,7.6 | 5.1,5.3 5.12,5.29 | 5.1,5.3 5.1,4.6
  Bottom 0.406: 5.1,4.6 U$1.3
SCL1  (via drill 0.33)
  Top 0.152: U$2.28 26.1,11.5 26.1,5.7 v26.15,5.7
  Bottom 0.152: v26.15,5.7 26.2,5.7 26.2,4.95
  Bottom 0.406: 15,4.95 OUT.P$4 26.2,4.95 IN2.P$1 33,4.95
SCL2
  Bottom 0.152: 6.38,4.62 U$1.2 6.38,2.02 R2.1 6.2,1.8 7,1 9.2,1 9.7,1.5 IN.P$1
  Bottom 0.406: IN.P$1 15,4.95
SCL3  (via drill 0.33)
  Top 0.152: U$4.28 44.1,11.5 44.1,5.7 v44.15,5.7
  Bottom 0.152: v44.15,5.7 44.2,5.7 44.2,4.95
  Bottom 0.406: 33,4.95 OUT2.P$4 44.2,4.95 IN3.P$1 51,4.95
SCL4  (via drill 0.33)
  Top 0.152: U$7.28 62.1,11.5 62.1,5.7 v62.15,5.7
  Bottom 0.152: v62.15,5.7 62.2,5.7 62.2,4.95
  Bottom 0.406: 51,4.95 OUT3.P$4 62.2,4.95 IN4.P$1 69,4.95
SCL5  (via drill 0.33)
  Top 0.152: U$9.28 80.1,11.5 80.1,5.7 v80.15,5.7
  Bottom 0.152: v80.15,5.7 80.2,5.7 80.2,4.95
  Bottom 0.406: 69,4.95 OUT4.P$4 80.2,4.95 IN5.P$1 87,4.95
SCL6  (via drill 0.33)
  Top 0.152: U$11.28 98.1,11.5 98.1,5.7 v98.15,5.7
  Bottom 0.152: v98.15,5.7 98.2,5.7 98.2,4.95
  Bottom 0.406: 87,4.95 OUT5.P$4 98.2,4.95 IN6.P$1 105,4.95
SCL7  (via drill 0.33)
  Top 0.152: U$13.28 116.1,11.5 116.1,5.7 v116.15,5.7
  Bottom 0.152: v116.15,5.7 116.2,5.7 116.2,4.95
  Bottom 0.406: 105,4.95 OUT6.P$4 116.2,4.95 IN7.P$1 123,4.95
SCL8  (via drill 0.33)
  Top 0.152: U$15.28 134.1,11.5 134.1,5.7 v134.15,5.7
  Bottom 0.152: v134.15,5.7 134.2,5.7 134.2,4.95
  Bottom 0.406: 123,4.95 OUT7.P$4 134.2,4.95 IN8.P$1 141,4.95
SCL9  (via drill 0.33)
  Top 0.152: U$17.28 152.1,11.5 152.1,5.7 v152.15,5.7
  Bottom 0.152: v152.15,5.7 152.2,5.7 152.2,4.95
  Bottom 0.406: 141,4.95 OUT8.P$4 152.2,4.95 IN9.P$1 159,4.95
SDA  (via drill 0.33)
  Top 0.61: OUT1.P$1 v7.5,7.5 IN1.P$4
  Bottom 0.152: U$1.6 5,9.7 5,8.5 6,7.5 v7.5,7.5
SDA1  (via drill 0.33)
  Top 0.152: U$2.27 27,11.5 27,10.4 v26.95,10.4
  Bottom 0.152: IN2.P$4 28.2,9.6 | IN2.P$4 27.7,9.6 | IN2.P$4 27.2,9.6 | v26.95,10.4 27,10.4 27,9.6 IN2.P$4
  Bottom 0.406: 15,9.45 OUT.P$1 IN2.P$4 33,9.45
SDA2
  Bottom 0.152: U$1.7 6.38,12.21 R1.1 7.1,13.3 9.2,13.3 9.7,12.8 IN.P$4
  Bottom 0.406: IN.P$4 15,9.45
SDA3  (via drill 0.33)
  Top 0.152: U$4.27 45,11.5 45,10.4 v44.95,10.4
  Bottom 0.152: IN3.P$4 46.2,9.6 | IN3.P$4 45.7,9.6 | IN3.P$4 45.2,9.6 | v44.95,10.4 45,10.4 45,9.6 IN3.P$4
  Bottom 0.406: 33,9.45 OUT2.P$1 IN3.P$4 51,9.45
SDA4  (via drill 0.33)
  Top 0.152: U$7.27 63,11.5 63,10.4 v62.95,10.4
  Bottom 0.152: IN4.P$4 64.2,9.6 | IN4.P$4 63.7,9.6 | IN4.P$4 63.2,9.6 | v62.95,10.4 63,10.4 63,9.6 IN4.P$4
  Bottom 0.406: 51,9.45 OUT3.P$1 IN4.P$4 69,9.45
SDA5  (via drill 0.33)
  Top 0.152: U$9.27 81,11.5 81,10.4 v80.95,10.4
  Bottom 0.152: IN5.P$4 82.2,9.6 | IN5.P$4 81.7,9.6 | IN5.P$4 81.2,9.6 | v80.95,10.4 81,10.4 81,9.6 IN5.P$4
  Bottom 0.406: 69,9.45 OUT4.P$1 IN5.P$4 87,9.45
SDA6  (via drill 0.33)
  Top 0.152: U$11.27 99,11.5 99,10.4 v98.95,10.4
  Bottom 0.152: IN6.P$4 100.2,9.6 | IN6.P$4 99.7,9.6 | IN6.P$4 99.2,9.6 | v98.95,10.4 99,10.4 99,9.6 IN6.P$4
  Bottom 0.406: 87,9.45 OUT5.P$1 IN6.P$4 105,9.45
SDA7  (via drill 0.33)
  Top 0.152: U$13.27 117,11.5 117,10.4 v116.95,10.4
  Bottom 0.152: IN7.P$4 118.2,9.6 | IN7.P$4 117.7,9.6 | IN7.P$4 117.2,9.6 | v116.95,10.4 117,10.4 117,9.6 IN7.P$4
  Bottom 0.406: 105,9.45 OUT6.P$1 IN7.P$4 123,9.45
SDA8  (via drill 0.33)
  Top 0.152: U$15.27 135,11.5 135,10.4 v134.95,10.4
  Bottom 0.152: IN8.P$4 136.2,9.6 | IN8.P$4 135.7,9.6 | IN8.P$4 135.2,9.6 | v134.95,10.4 135,10.4 135,9.6 IN8.P$4
  Bottom 0.406: 123,9.45 OUT7.P$1 IN8.P$4 141,9.45
SDA9  (via drill 0.33)
  Top 0.152: U$17.27 153,11.5 153,10.4 v152.95,10.4
  Bottom 0.152: IN9.P$4 154.2,9.6 | IN9.P$4 153.7,9.6 | IN9.P$4 153.2,9.6 | v152.95,10.4 153,10.4 153,9.6 IN9.P$4
  Bottom 0.406: 141,9.45 OUT8.P$1 IN9.P$4 159,9.45
SS  (via drill 0.33)
  Top 0.152: R8.1 v17.6,1.6 | v26.5,4.1 26.9,3.7 26.9,3 U$2.14
  Bottom 0.152: v17.6,1.6 24,1.6 v26.5,4.1
SS1  (via drill 0.33)
  Top 0.152: R13.1 v35.6,1.6 | v44.5,4.1 44.9,3.7 44.9,3 U$4.14
  Bottom 0.152: v35.6,1.6 42,1.6 v44.5,4.1
SS2  (via drill 0.33)
  Top 0.152: R18.1 v53.6,1.6 | v62.5,4.1 62.9,3.7 62.9,3 U$7.14
  Bottom 0.152: v53.6,1.6 60,1.6 v62.5,4.1
SS3  (via drill 0.33)
  Top 0.152: R23.1 v71.6,1.6 | v80.5,4.1 80.9,3.7 80.9,3 U$9.14
  Bottom 0.152: v71.6,1.6 78,1.6 v80.5,4.1
SS4  (via drill 0.33)
  Top 0.152: R28.1 v89.6,1.6 | v98.5,4.1 98.9,3.7 98.9,3 U$11.14
  Bottom 0.152: v89.6,1.6 96,1.6 v98.5,4.1
SS5  (via drill 0.33)
  Top 0.152: R33.1 v107.6,1.6 | v116.5,4.1 116.9,3.7 116.9,3 U$13.14
  Bottom 0.152: v107.6,1.6 114,1.6 v116.5,4.1
SS6  (via drill 0.33)
  Top 0.152: R38.1 v125.6,1.6 | v134.5,4.1 134.9,3.7 134.9,3 U$15.14
  Bottom 0.152: v125.6,1.6 132,1.6 v134.5,4.1
SS7  (via drill 0.33)
  Top 0.152: R43.1 v143.6,1.6 | v152.5,4.1 152.9,3.7 152.9,3 U$17.14
  Bottom 0.152: v143.6,1.6 150,1.6 v152.5,4.1
STATUS
  Top 0.152: R6.2 31.5,9.8 31,9.3 30.1,9.3 U$2.23
STATUS1
  Top 0.152: R11.2 49.5,9.8 49,9.3 48.1,9.3 U$4.23
STATUS2
  Top 0.152: R16.2 67.5,9.8 67,9.3 66.1,9.3 U$7.23
STATUS3
  Top 0.152: R21.2 85.5,9.8 85,9.3 84.1,9.3 U$9.23
STATUS4
  Top 0.152: R26.2 103.5,9.8 103,9.3 102.1,9.3 U$11.23
STATUS5
  Top 0.152: R31.2 121.5,9.8 121,9.3 120.1,9.3 U$13.23
STATUS6
  Top 0.152: R36.2 139.5,9.8 139,9.3 138.1,9.3 U$15.23
STATUS7
  Top 0.152: R41.2 157.5,9.8 157,9.3 156.1,9.3 U$17.23
VCC  (via drill 0.41)
  Top 0.406: 6,6.9 v5.7,6.9
  Top 0.61: OUT1.P$2 6,6.9 IN1.P$3
  Bottom 0.406: IN.P$3 15,7.95
  pour Bottom: 0,18 14.5,18 14.5,0 0,0
VCC1  (via drill 0.33)
  Top 0.152: 31.25,5.95 31.6,6.3 31.6,7.9 v31.5,8 | 31.25,5.95 30.6,5.3 30.1,5.3 U$2.18 | 31.25,5.95 31.8,5.4 31.8,1.3 WITHVIAS-SMV1.6 | R7.2 22.8,16.9 22.2,17.5 20.1,17.5 C3.2 19.5,16.8 18.9,16.8 18.2,16.1 U$6.+ 18.3,15.9 17.5,16.7 D1.C | 21.4,7.7 U$2.4 19.8,7.65 C2.1 | R9.2 C2.1 | C2.1 19.5,7.4 19.1,7.8 18.6,7.8 v18.4,8 v18.4,10.5
  Bottom 0.152: 22.9,7.95 22.9,8 | OUT.P$2 20.08,8.12 | 16.2,7.95 16.2,8 | v18.4,8 18.5,7.95 | 32,7.95 v31.5,8 | 33,7.95 33.1,8.1 | v18.4,10.5 18.9,11 18.9,14.3 18.3,14.9 U$6.+
  Bottom 0.406: 33,7.95 32,7.95 IN2.P$3 22.9,7.95 OUT.P$2 18.5,7.95 16.2,7.95 15,7.95
VCC2  (via drill 0.33)
  Top 0.152: 49.25,5.95 49.6,6.3 49.6,7.9 v49.5,8 | 49.25,5.95 48.6,5.3 48.1,5.3 U$4.18 | 49.25,5.95 49.8,5.4 49.8,1.3 WITHVIAS-SMV2.6 | R12.2 40.8,16.9 40.2,17.5 38.1,17.5 C5.2 37.5,16.8 36.9,16.8 36.2,16.1 U$3.+ 36.3,15.9 35.5,16.7 D2.C | 39.4,7.7 U$4.4 37.8,7.65 C4.1 | R14.2 C4.1 | C4.1 37.5,7.4 37.1,7.8 36.6,7.8 v36.4,8 v36.4,10.5
  Bottom 0.152: 40.9,7.95 40.9,8 | OUT2.P$2 38.08,8.12 | 34.2,7.95 34.2,8 | v36.4,8 36.5,7.95 | 50,7.95 v49.5,8 | 51,7.95 51.1,8.1 | v36.4,10.5 36.9,11 36.9,14.3 36.3,14.9 U$3.+
  Bottom 0.406: 51,7.95 50,7.95 IN3.P$3 40.9,7.95 OUT2.P$2 36.5,7.95 34.2,7.95 33,7.95
VCC3  (via drill 0.33)
  Top 0.152: 67.25,5.95 67.6,6.3 67.6,7.9 v67.5,8 | 67.25,5.95 66.6,5.3 66.1,5.3 U$7.18 | 67.25,5.95 67.8,5.4 67.8,1.3 WITHVIAS-SMV3.6 | R17.2 58.8,16.9 58.2,17.5 56.1,17.5 C7.2 55.5,16.8 54.9,16.8 54.2,16.1 U$5.+ 54.3,15.9 53.5,16.7 D3.C | 57.4,7.7 U$7.4 55.8,7.65 C6.1 | R19.2 C6.1 | C6.1 55.5,7.4 55.1,7.8 54.6,7.8 v54.4,8 v54.4,10.5
  Bottom 0.152: 58.9,7.95 58.9,8 | OUT3.P$2 56.08,8.12 | 52.2,7.95 52.2,8 | v54.4,8 54.5,7.95 | 68,7.95 v67.5,8 | 69,7.95 69.1,8.1 | v54.4,10.5 54.9,11 54.9,14.3 54.3,14.9 U$5.+
  Bottom 0.406: 69,7.95 68,7.95 IN4.P$3 58.9,7.95 OUT3.P$2 54.5,7.95 52.2,7.95 51,7.95
VCC4  (via drill 0.33)
  Top 0.152: 85.25,5.95 85.6,6.3 85.6,7.9 v85.5,8 | 85.25,5.95 84.6,5.3 84.1,5.3 U$9.18 | 85.25,5.95 85.8,5.4 85.8,1.3 WITHVIAS-SMV4.6 | R22.2 76.8,16.9 76.2,17.5 74.1,17.5 C9.2 73.5,16.8 72.9,16.8 72.2,16.1 U$8.+ 72.3,15.9 71.5,16.7 D4.C | 75.4,7.7 U$9.4 73.8,7.65 C8.1 | R24.2 C8.1 | C8.1 73.5,7.4 73.1,7.8 72.6,7.8 v72.4,8 v72.4,10.5
  Bottom 0.152: 76.9,7.95 76.9,8 | OUT4.P$2 74.08,8.12 | 70.2,7.95 70.2,8 | v72.4,8 72.5,7.95 | 86,7.95 v85.5,8 | 87,7.95 87.1,8.1 | v72.4,10.5 72.9,11 72.9,14.3 72.3,14.9 U$8.+
  Bottom 0.406: 87,7.95 86,7.95 IN5.P$3 76.9,7.95 OUT4.P$2 72.5,7.95 70.2,7.95 69,7.95
VCC5  (via drill 0.33)
  Top 0.152: 103.25,5.95 103.6,6.3 103.6,7.9 v103.5,8 | 103.25,5.95 102.6,5.3 102.1,5.3 U$11.18 | 103.25,5.95 103.8,5.4 103.8,1.3 WITHVIAS-SMV5.6 | R27.2 94.8,16.9 94.2,17.5 92.1,17.5 C11.2 91.5,16.8 90.9,16.8 90.2,16.1 U$10.+ 90.3,15.9 89.5,16.7 D5.C | 93.4,7.7 U$11.4 91.8,7.65 C10.1 | R29.2 C10.1 | C10.1 91.5,7.4 91.1,7.8 90.6,7.8 v90.4,8 v90.4,10.5
  Bottom 0.152: 94.9,7.95 94.9,8 | OUT5.P$2 92.08,8.12 | 88.2,7.95 88.2,8 | v90.4,8 90.5,7.95 | 104,7.95 v103.5,8 | 105,7.95 105.1,8.1 | v90.4,10.5 90.9,11 90.9,14.3 90.3,14.9 U$10.+
  Bottom 0.406: 105,7.95 104,7.95 IN6.P$3 94.9,7.95 OUT5.P$2 90.5,7.95 88.2,7.95 87,7.95
VCC6  (via drill 0.33)
  Top 0.152: 121.25,5.95 121.6,6.3 121.6,7.9 v121.5,8 | 121.25,5.95 120.6,5.3 120.1,5.3 U$13.18 | 121.25,5.95 121.8,5.4 121.8,1.3 WITHVIAS-SMV6.6 | R32.2 112.8,16.9 112.2,17.5 110.1,17.5 C13.2 109.5,16.8 108.9,16.8 108.2,16.1 U$12.+ 108.3,15.9 107.5,16.7 D6.C | 111.4,7.7 U$13.4 109.8,7.65 C12.1 | R34.2 C12.1 | C12.1 109.5,7.4 109.1,7.8 108.6,7.8 v108.4,8 v108.4,10.5
  Bottom 0.152: 112.9,7.95 112.9,8 | OUT6.P$2 110.08,8.12 | 106.2,7.95 106.2,8 | v108.4,8 108.5,7.95 | 122,7.95 v121.5,8 | 123,7.95 123.1,8.1 | v108.4,10.5 108.9,11 108.9,14.3 108.3,14.9 U$12.+
  Bottom 0.406: 123,7.95 122,7.95 IN7.P$3 112.9,7.95 OUT6.P$2 108.5,7.95 106.2,7.95 105,7.95
VCC7  (via drill 0.33)
  Top 0.152: 139.25,5.95 139.6,6.3 139.6,7.9 v139.5,8 | 139.25,5.95 138.6,5.3 138.1,5.3 U$15.18 | 139.25,5.95 139.8,5.4 139.8,1.3 WITHVIAS-SMV7.6 | R37.2 130.8,16.9 130.2,17.5 128.1,17.5 C15.2 127.5,16.8 126.9,16.8 126.2,16.1 U$14.+ 126.3,15.9 125.5,16.7 D7.C | 129.4,7.7 U$15.4 127.8,7.65 C14.1 | R39.2 C14.1 | C14.1 127.5,7.4 127.1,7.8 126.6,7.8 v126.4,8 v126.4,10.5
  Bottom 0.152: 130.9,7.95 130.9,8 | OUT7.P$2 128.08,8.12 | 124.2,7.95 124.2,8 | v126.4,8 126.5,7.95 | 140,7.95 v139.5,8 | 141,7.95 141.1,8.1 | v126.4,10.5 126.9,11 126.9,14.3 126.3,14.9 U$14.+
  Bottom 0.406: 141,7.95 140,7.95 IN8.P$3 130.9,7.95 OUT7.P$2 126.5,7.95 124.2,7.95 123,7.95
VCC8  (via drill 0.33)
  Top 0.152: 157.25,5.95 157.6,6.3 157.6,7.9 v157.5,8 | 157.25,5.95 156.6,5.3 156.1,5.3 U$17.18 | 157.25,5.95 157.8,5.4 157.8,1.3 WITHVIAS-SMV8.6 | R42.2 148.8,16.9 148.2,17.5 146.1,17.5 C17.2 145.5,16.8 144.9,16.8 144.2,16.1 U$16.+ 144.3,15.9 143.5,16.7 D8.C | 147.4,7.7 U$17.4 145.8,7.65 C16.1 | R44.2 C16.1 | C16.1 145.5,7.4 145.1,7.8 144.6,7.8 v144.4,8 v144.4,10.5
  Bottom 0.152: 148.9,7.95 148.9,8 | OUT8.P$2 146.08,8.12 | 142.2,7.95 142.2,8 | v144.4,8 144.5,7.95 | 158,7.95 v157.5,8 | 159,7.95 159.1,8.1 | v144.4,10.5 144.9,11 144.9,14.3 144.3,14.9 U$16.+
  Bottom 0.406: 159,7.95 158,7.95 IN9.P$3 148.9,7.95 OUT8.P$2 144.5,7.95 142.2,7.95 141,7.95

## Text on the board
_tNames: IN | C3 | R1 | R2 | R3 | C3 | R1 | R2 | R3 | C3 | R1 | R2 | R3 | C3 | R1 | R2 | R3 | C3 | R1 | R2 | R3 | C3 | R1 | R2 | R3 | C3 | R1 | R2 | R3 | C3 | R1 | R2 | R3 | Motor | Error | Status | Motor | Error | Status | Motor | Error | Status | Motor | Error | Status | Motor | Error | Status | Motor | Error | Status | Motor | Error | Status | Motor | Error | Status | CUbiC | D1 | D1 | D1 | D1 | D1 | D1 | D1 | D1 | 4/16/2013 | rev .01 | Extender | C1 | C1 | C1 | C1 | C1 | C1 | C1 | C1 | OUT | Q1 | Q1 | Q1 | Q1 | Q1 | Q1 | Q1 | Q1 | R4 | R5 | R4 | R5 | R4 | R5 | R4 | R5 | R4 | R5 | R4 | R5 | R4 | R5 | R4 | R5
_bNames: CUbiC | CUbiC | CUbiC | CUbiC | CUbiC | CUbiC | CUbiC | CUbiC | R4 | R3 | Tactor | rev .02 | Tactor | rev .02 | Tactor | rev .02 | Tactor | rev .02 | Tactor | rev .02 | Tactor | rev .02 | Tactor | rev .02 | Tactor | rev .02 | R1 | C1 | OUT | IN | OUT | IN | OUT | IN | OUT | IN | OUT | IN | OUT | IN | OUT | IN | OUT | IN | LED1 | U$1 | R2